# Altium PCB PCB_Receiver.PcbDoc
Units mm, origin at the board's own origin, x right, y up, seen from the top; angles counter-clockwise.
Board outline 144.4 x 91.06 mm, 2 copper layers (Top Layer, Bottom Layer); 83 components, 36 nets, 194 pads, 0 vias.
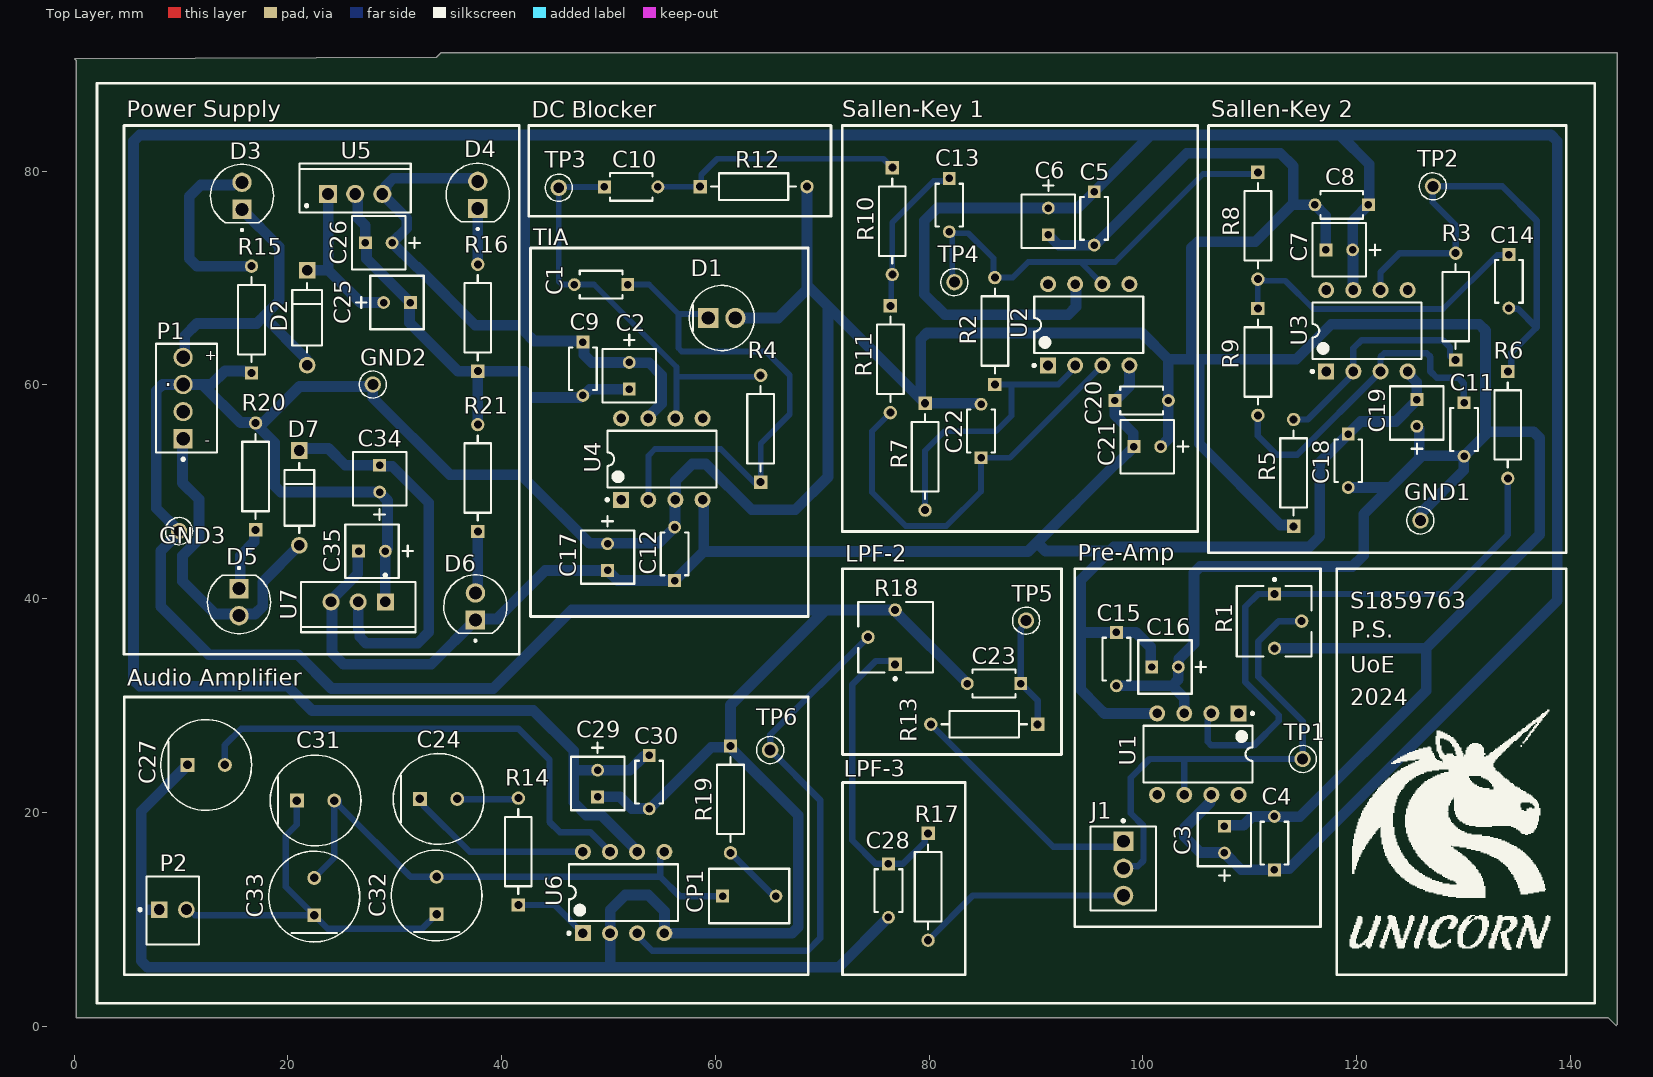
[diagram p0: Top Layer view]
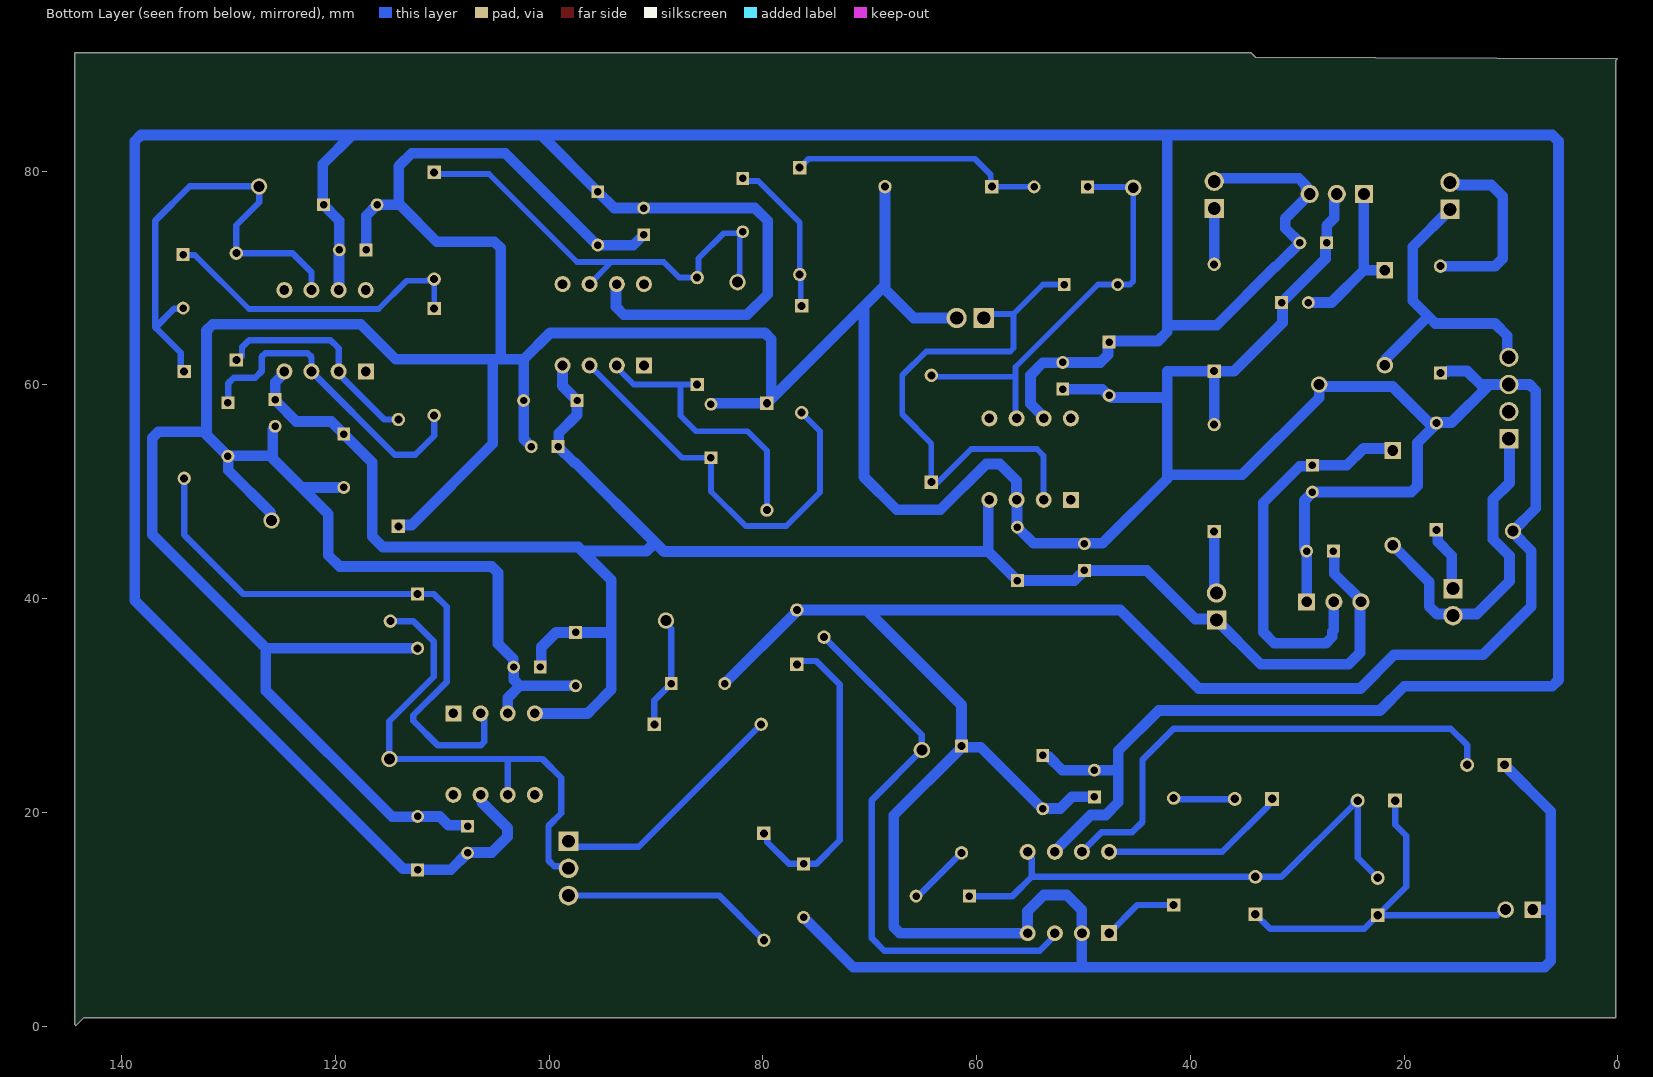
[diagram p1: Bottom Layer view, seen from below]
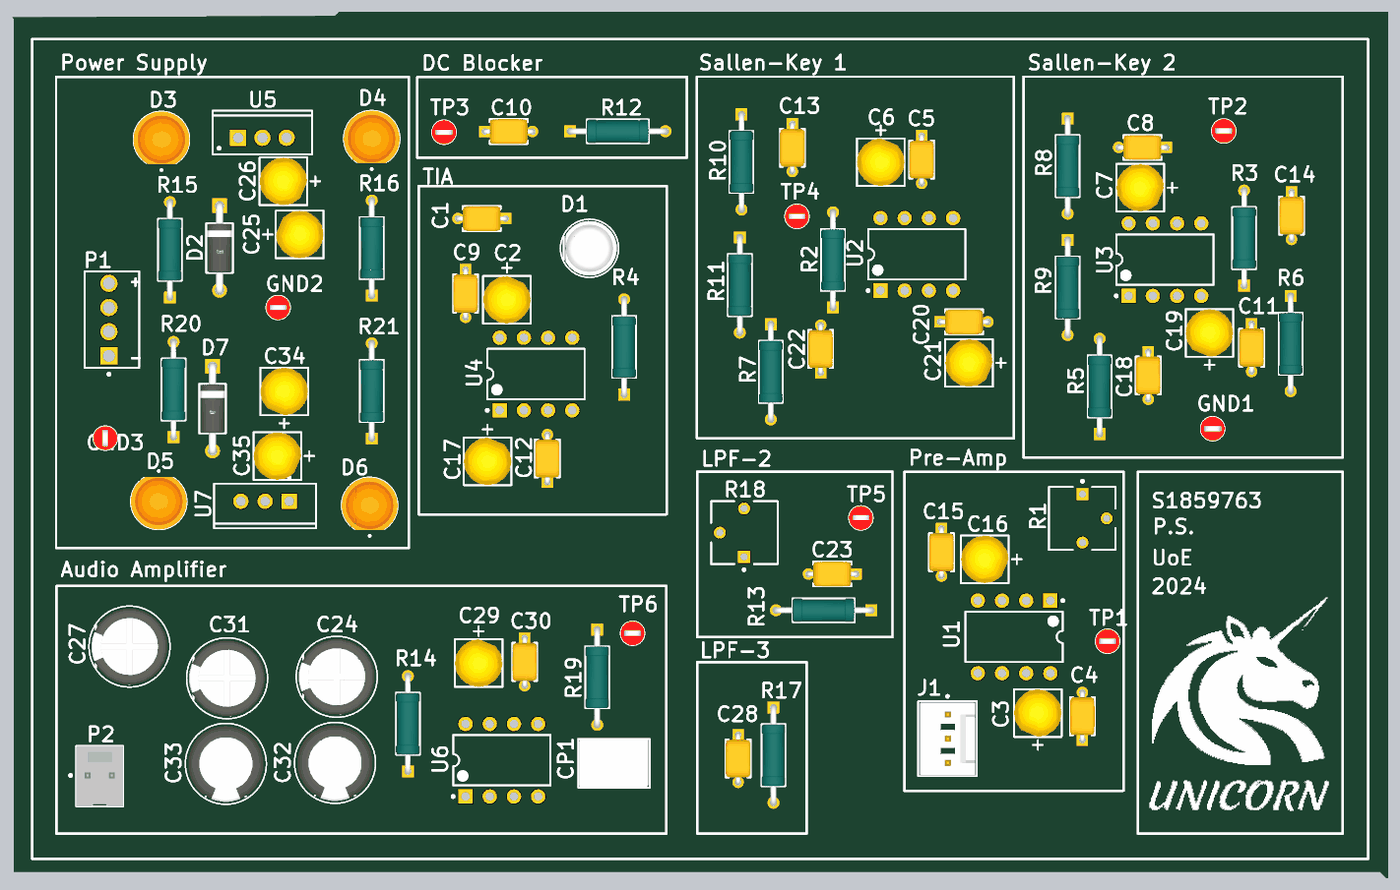
[diagram p2: 3D render of the assembled board from above, using the file's embedded part models]

## Layer stack, top to bottom
Top Solder: solder mask 0.0102, Solder Resist, Dk 3.5
Top Layer: signal copper 0.0356
Dielectric 1: dielectric 0.32, FR-4, Dk 4.8
Bottom Layer: signal copper 0.0356
Bottom Solder: solder mask 0.0102, Solder Resist, Dk 3.5

## Board outline
33.909,90.678 34.341,91.11 144.424,91.11 144.424,0.178 144.297,0.051 143.586,0.762 0.178,0.762 0.178,90.373 0.025,90.526

## Design rules (kind name [scope] priority, off if disabled: settings)
Clearance [All] p1: gap=0.6 ignorepadtopadclearanceinfootprint=FALSE
PlaneClearance [All] p1: clearance=0.6
PlaneConnect [InNet('GND')] p1: planeconnectstyle=Relief reliefexpansion=0.408 reliefentries=4 reliefconductorwidth=0.254 reliefairgap=0.254
PolygonConnect [All] p1: connectstyle=Relief reliefconductorwidth=1 reliefentries=4 polygonreliefangle="90 Angle" airgapwidth=1
RoutingVias [All] p1: holewidth=0.711 width=1.27 viastyle="Through Hole" minholewidth=0.711 minwidth=1.27 maxholewidth=0.711 maxwidth=1.27
SolderMaskExpansion [All] p1: expansion=0.102 istentingtop=FALSE
Width PS [(InNet('NetD3_A') OR InNet('NetD4_C') OR InNet('NetC34_1') OR InNet('NetD5_A') OR InNet('NetD6_A') OR InNet('NetD5_C') OR InNet('NetC25_2') OR InNet('NetD2_2'))] p1: maxlimit=1.1 minlimit=1 preferedwidth=1
Width GND [InNet('GND')] p2: maxlimit=1.1 minlimit=1 preferedwidth=1
Width -12 [InNet('-12V')] p3: maxlimit=1.1 minlimit=1 preferedwidth=1
Width +12 [InNet('+12V')] p4: maxlimit=1.1 minlimit=1 preferedwidth=1
Width ALL [InNetClass('All Nets')] p5: maxlimit=0.6 minlimit=0.54 preferedwidth=0.54
28 further rules are at their usual default settings.

## Classes and differential pairs
net class C33_Nets: NetC31_1 NetC31_2
net class C31_Nets: NetC31_1 NetC31_2
net class C29_Nets: +12V GND NetC29_2
net class C24_Nets: NetC24_1 NetC24_2
net class C4_Nets: +12V GND
net class C2_Nets: +12V GND
net class C1_Nets: NetC1_1 NetC1_2
net class C3_Nets: +12V GND
net class U6_Nets: +12V GND NetC24_1 NetC27_2 NetC31_2 NetR14_1 NetR18_2
net class C17_Nets: -12V GND
net class P2_Nets: GND NetC31_1
net class C27_Nets: GND NetC27_2
net class C16_Nets: -12V GND
net class TP2_Nets: NetC14_2
net class CP1_Nets: NetC31_2 NetCP1_2
net class C30_Nets: +12V GND
net class TP6_Nets: NetR18_2
net class GND3_Nets: GND
net class GND1_Nets: GND
net class TP3_Nets: NetC1_2
net class TP1_Nets: NetJ1_2
net class TP4_Nets: NetC13_2
net class C34_Nets: GND NetC34_1
net class J1_Nets: NetJ1_1 NetJ1_2 NetJ1_3
net class TP5_Nets: NetC23_1
net class R20_Nets: GND NetD5_C
net class D7_Nets: NetC34_1 NetD5_A
net class D6_Nets: -12V NetD6_A
net class D5_Nets: NetD5_A NetD5_C
net class D4_Nets: +12V NetD4_C
net class U7_Nets: -12V GND NetC34_1
net class U2_Nets: +12V -12V NetC13_2 NetC22_1 NetR2_1 NetU2_1 NetU2_5 NetU2_7 NetU2_8
net class R13_Nets: NetC23_1 NetJ1_1
net class R12_Nets: GND NetC10_2
net class C32_Nets: NetC31_1 NetC31_2
net class C14_Nets: NetC14_1 NetC14_2
net class U1_Nets: +12V -12V GND NetJ1_2 NetR1_1
net class C12_Nets: -12V GND
net class R19_Nets: GND NetCP1_2
net class C8_Nets: +12V GND
net class U3_Nets: +12V -12V NetC11_1 NetC14_2 NetR3_1
net class U4_Nets: +12V -12V GND NetC1_1 NetC1_2 NetU4_1 NetU4_5 NetU4_8
net class U5_Nets: +12V GND NetC25_2 NetU1_1 NetU1_5 NetU1_8
net class R21_Nets: GND NetD6_A
net class R16_Nets: GND NetD4_C
net class GND2_Nets: GND
net class R18_Nets: GND NetC28_1 NetR18_1 NetR18_2
net class R17_Nets: NetC28_1 NetJ1_3
net class R15_Nets: GND NetD3_A
net class R14_Nets: NetC24_2 NetR14_1
net class R11_Nets: NetC13_1 NetC22_1
net class R10_Nets: NetC10_2 NetC13_1
net class R9_Nets: NetC11_1 NetC14_1
net class R8_Nets: NetC13_2 NetC14_1
net class R7_Nets: GND NetR2_1
net class R6_Nets: NetC14_2 NetR1_1
net class R5_Nets: GND NetR3_1
net class R4_Nets: NetC1_1 NetC1_2
net class R3_Nets: NetC14_2 NetR3_1
net class R2_Nets: NetC13_2 NetR2_1
net class R1_Nets: GND NetJ1_2 NetR1_1
net class P1_Nets: GND NetD2_2 NetD5_A NetP1_2
net class D3_Nets: NetD2_2 NetD3_A
net class D2_Nets: NetC25_2 NetD2_2
net class C15_Nets: -12V GND
net class C35_Nets: -12V GND
net class C26_Nets: +12V GND
net class C28_Nets: GND NetC28_1
net class C11_Nets: GND NetC11_1
net class C10_Nets: NetC1_2 NetC10_2
net class C25_Nets: GND NetC25_2
net class C22_Nets: GND NetC22_1
net class C21_Nets: -12V GND
net class C20_Nets: -12V GND
net class C19_Nets: -12V GND
net class C18_Nets: -12V GND
net class C23_Nets: GND NetC23_1
net class C13_Nets: NetC13_1 NetC13_2
net class C6_Nets: +12V GND
net class D1_Nets: GND NetC1_1
net class C9_Nets: +12V GND
net class C7_Nets: +12V GND
net class C5_Nets: +12V GND

## Components (designator, comment, footprint, x,y, rotation, side; value= is the part's Value field where it differs from the comment)
C1 "8p" FP-K15H5-MFG 49.301,69.393 r180 top
C2 "2.2u" FP-TAP106K016SCS-MFG 51.941,60.86 r90 top
C3 "2.2u" FP-TAP106K016SCS-MFG 107.645,17.45 r270 top
C4 "0.1n" FP-K15H5-MFG 112.319,17.12 r90 top
C5 "0.1n" FP-K15H5-MFG 95.453,75.59 r270 top
C6 "2.2u" FP-TAP106K016SCS-MFG 91.161,75.311 r90 top
C7 "2.2u" FP-TAP106K016SCS-MFG 118.389,72.644 r0 top
C8 "0.1n" FP-K15H5-MFG 118.618,76.86 r180 top
C9 "0.1n" FP-K15H5-MFG 47.6,61.519 r270 top
C10 "22n" FP-K15H5-MFG 52.121,78.537 r0 top
C11 "100p" FP-K15H5-MFG 130.073,55.829 r270 top
C12 "0.1n" FP-K15H5-MFG 56.185,44.196 r90 top
C13 "100p" FP-K15H5-MFG 81.89,76.835 r270 top
C14 "100p" FP-K15H5-MFG 134.264,69.698 r270 top
C15 "0.1n" FP-K15H5-MFG 97.536,34.341 r270 top
C16 "2.2u" FP-TAP106K016SCS-MFG 102.083,33.604 r0 top
C17 "2.2u" FP-TAP106K016SCS-MFG 49.911,43.891 r90 top
C18 "0.1n" FP-K15H5-MFG 119.228,52.908 r270 top
C19 "2.2u" FP-TAP106K016SCS-MFG 125.654,57.379 r270 top
C20 "0.1n" FP-K15H5-MFG 99.898,58.547 r0 top
C21 "2.2u" FP-TAP106K016SCS-MFG 100.426,54.229 r0 top
C22 "100p" FP-K15H5-MFG 84.861,55.691 r90 top
C23 "22p" FP-K15H5-MFG 86.081,32.055 r180 top
C24 "10u" FP-RAD-TH-D_8_0_5-L_11_5-MFG 34.087,21.26 r0 top
C25 "0.33u" FP-TAP106K016SCS-MFG 30.201,67.716 r180 top
C26 "0.1u" FP-TAP106K016SCS-MFG 28.493,73.302 r0 top
C27 "10u" FP-RAD-TH-D_8_0_5-L_11_5-MFG 12.344,24.435 r0 top
C28 "1n" FP-K15H5-MFG 76.2,12.675 r270 top
C29 "2.2u" FP-TAP106K016SCS-MFG 48.979,22.701 r90 top
C30 "0.1n" FP-K15H5-MFG 53.805,22.828 r270 top
C31 "47uF" FP-RAD-TH-D_8_0_5-L_11_5-MFG 22.583,21.107 r0 top
C32 "100uF" FP-EEU-FR1H101B-MFG 33.909,12.217 r90 top
C33 "100uF" FP-EEU-FR1H101B-MFG 22.454,12.118 r90 top
C34 "0.33u" FP-TAP106K016SCS-MFG 28.575,51.232 r270 top
C35 "0.1u" FP-TAP106K016SCS-MFG 27.864,44.45 r0 top
CP1 "47n" FP-R82DC4100DQ60J-MFG 63.17,12.167 r0 top
D1 "BPV10" FP-6_544-5185_02-4-MFG 60.604,66.269 r0 top
D2 "1N4007" FP-1N4007-MFG 21.793,66.294 r270 top value=15pF
D3 "RED" LEDRD254W57D500H1070 15.697,77.699 r90 top
D4 "GREEN" LEDRD254W57D500H1070 37.761,77.791 r90 top
D5 "RED" LEDRD254W57D500H1070 15.418,39.675 r270 top
D6 "GREEN" LEDRD254W57D500H1070 37.541,39.268 r90 top
D7 "1N4007" FP-1N4007-MFG 21.057,49.428 r270 top value=15pF
GND1 "" KEYSTONE_5000 125.984,47.32 r0 top
GND2 "" KEYSTONE_5000 27.94,60.046 r0 top
GND3 "" KEYSTONE_5000 9.804,46.33 r90 top
J1 "22-29-2031" FP-22-29-2031-MFG 98.176,14.757 r270 top
P1 "640456-4" TECO-640456-4 10.185,58.776 r270 top
P2 "22-23-2021" MOLX-22-23-2021_V 9.22,10.897 r0 top
R1 "3362P-1-104LF-100k" BOUR-3362P 112.293,37.897 r270 top
R2 "1K" FP-MRS25-MFG 86.157,65.049 r90 top
R3 "1k" FP-MRS25-MFG 129.286,67.335 r90 top
R4 "3k3" FP-MRS25-MFG 64.237,55.905 r90 top
R5 "2.2k" FP-MRS25-MFG 114.122,51.765 r90 top
R6 "10k" FP-MRS25-MFG 134.163,56.261 r270 top
R7 "2.2k" FP-MRS25-MFG 79.629,53.289 r270 top
R8 "270" FP-MRS25-MFG 110.769,74.905 r270 top
R9 "270" FP-MRS25-MFG 110.769,62.154 r270 top
R10 "270" FP-MRS25-MFG 76.556,75.336 r270 top
R11 "270" FP-MRS25-MFG 76.378,62.408 r270 top
R12 "4k7" FP-MRS25-MFG 63.576,78.562 r0 top
R13 "1k2" FP-MRS25-MFG 85.166,28.245 r180 top
R14 "1k2" FP-MRS25-MFG 41.554,16.332 r90 top
R15 "2k2" FP-MRS25-MFG 16.586,66.116 r90 top
R16 "33K" FP-MRS25-MFG 37.761,66.291 r90 top
R17 "1k5" FP-MRS25-MFG 79.908,13.03 r270 top
R18 "3362P-1-103LF" BOUR-3362P 76.86,36.398 r90 top
R19 "10" FP-MRS25-MFG 61.417,21.209 r270 top
R20 "2k2" FP-MRS25-MFG 16.967,51.435 r90 top
R21 "33K" FP-MRS25-MFG 37.761,51.291 r90 top
TP1 "5000" KEYSTONE_5000 114.96,24.994 r0 top
TP2 "5000" KEYSTONE_5000 127.152,78.588 r0 top
TP3 "5000" KEYSTONE_5000 45.339,78.461 r0 top
TP4 "5000" KEYSTONE_5000 82.372,69.621 r0 top
TP5 "5000" KEYSTONE_5000 89.078,37.948 r0 top
TP6 "5000" KEYSTONE_5000 65.126,25.832 r0 top
U1 "LM6171" P0008A 105.156,25.451 r270 top
U2 "LM6171" P0008A 94.945,65.634 r90 top
U3 "LM6171" P0008A 120.98,65.075 r90 top
U4 "LM318N" P0008A 54.991,53.061 r90 top
U5 "LM78L12ACZ" TO220 26.289,77.876 r0 top
U6 "LM386N-1" TI-P8 51.41,12.497 r90 top
U7 "LM79L12" NDE0003A 26.568,39.7 r180 top

## Footprints (in the part's own frame and the unit in brackets; to place one, negate y for a bottom-side part, rotate by r counter-clockwise, add the part's x,y. Pads: shape width x height; smd on the part's side, far side on the other; paste and mask are expansions set on the pad)
BOUR-3362P [mm] "THD, 3-Leads, Body 6.6x6.99mm, Pitch 2.54mm"
  rect 1.25x1.25 hole 0.75: 1(-2.54,0.035)
  round 1.25 hole 0.75: 2(0,2.575) 3(2.54,0.035)
  silkscreen extent -4.02,-3.49 3.3,3.49, body extent -3.3,-3.49 3.3,3.49, height 4.95
FP-1N4007-MFG [mm]
  rect 1.55x1.55 hole 1 paste-2539.97 mask+0: 1(-4.44,0)
  round 1.55 hole 1 paste-2539.97 mask+0: 2(4.44,0)
  silkscreen extent -3.27,-1.4 3.27,1.4, body extent -5.32,-1.5 5.32,1.5, height 0.25
FP-6_544-5185_02-4-MFG [mm]
  rect 1.9x1.9 hole 1.25 paste-2539.97 mask+0: 1(-1.27,0)
  round 1.9 hole 1.25 paste-2539.97 mask+0: 2(1.27,0)
  silkscreen extent -3.05,-3.05 3.05,3.05, body extent -3.05,-3.05 3.05,3.05, height 0.25
FP-22-29-2031-MFG [mm]
  rect 1.84x1.84 hole 1.19 paste-2539.97 mask+0: 1(-2.54,0.02)
  round 1.84 hole 1.19 paste-2539.97 mask+0: 2(0,0.02) 3(2.54,0.02)
  silkscreen extent -4.57,-3.08 3.93,3.07, body extent -4.04,-3.18 4.04,3.17, height 0.25
FP-EEU-FR1H101B-MFG [mm]
  rect 1.3x1.3 hole 0.8 paste-2539.97 mask+0: 1(-1.75,0)
  round 1.3 hole 0.8 paste-2539.97 mask+0: 2(1.75,0)
  silkscreen extent -4.25,-4.25 4.25,4.25, body extent -4.35,-4.35 4.35,4.35, height 0.25
FP-K15H5-MFG [mm]
  rect 1.2x1.2 hole 0.7 paste-2539.97 mask+0: 1(-2.5,0)
  round 1.2 hole 0.7 paste-2539.97 mask+0: 2(2.5,0)
  silkscreen extent -2,-1.3 2,1.3, body extent -3.2,-1.4 3.2,1.4, height 0.25
FP-MRS25-MFG [mm]
  rect 1.25x1.25 hole 0.75 paste-2539.97 mask+0: 1(-5,0)
  round 1.25 hole 0.75 paste-2539.97 mask+0: 2(5,0)
  silkscreen extent -3.97,-1.25 3.97,1.25, body extent -5.72,-1.35 5.72,1.35, height 0.25
FP-R82DC4100DQ60J-MFG [mm]
  rect 1.2x1.2 hole 0.7 paste-2539.97 mask+0: 1(-2.5,0)
  round 1.2 hole 0.7 paste-2539.97 mask+0: 2(2.5,0)
  silkscreen extent -3.75,-2.55 3.75,2.55, body extent -3.85,-2.65 3.85,2.65, height 0.25
FP-RAD-TH-D_8_0_5-L_11_5-MFG [mm]
  rect 1.3x1.3 hole 0.8 paste-2539.97 mask+0: 1(-1.75,0)
  round 1.3 hole 0.8 paste-2539.97 mask+0: 2(1.75,0)
  silkscreen extent -4.25,-4.25 4.25,4.25, body extent -4.35,-4.35 4.35,4.35, height 0.25
FP-TAP106K016SCS-MFG [mm]
  rect 1.2x1.2 hole 0.7 paste-2539.97 mask+0: 1(-1.25,0)
  round 1.2 hole 0.7 paste-2539.97 mask+0: 2(1.25,0)
  silkscreen extent -2.5,-2.5 3.85,2.5, body extent -2.6,-2.6 2.6,2.6, height 0.25
KEYSTONE_5000 [mm]
  round 1.53 hole 1.02: TP(0,0)
  silkscreen extent -1.27,-1.27 1.27,1.27, body extent -1.27,-1.27 1.27,1.27, height 4.57
LEDRD254W57D500H1070 [mm]
  round 1.815 hole 1.21: A(1.27,0)
  rect 1.815x1.815 / inner round 1.815 / far side rect 1.815x1.815 hole 1.21: C(-1.27,0)
  silkscreen extent -3.3,-2.96 2.96,2.96, body extent -2.6,-2.95 2.95,2.95, height 9.1
MOLX-22-23-2021_V [mm] "THD, 2-Leads, Body 6.35x4.93mm, Pitch 2.54mm"
  rect 1.55x1.55 hole 1.02: 1(-1.27,0)
  round 1.55 hole 1.02: 2(1.27,0)
  silkscreen extent -3.19,-3.25 2.47,3.1, body extent -2.46,-3.25 2.46,3.1, height 10.66
NDE0003A [mm] "FM, 3-Leads, Body 10.7x4.7mm, Pitch 2.54mm"
  rect 1.6x1.6 hole 1: 1(-2.54,0)
  round 1.6 hole 1: 2(0,0) 3(2.54,0)
  silkscreen extent -5.35,-2.62 5.35,2.85, body extent -5.4,-1.9 5.4,2.9, height 19.4
P0008A [mm] "DIP, 8-Leads, Body 10.15x6.6mm, Pitch 2.54mm"
  rect 1.5x1.5 hole 0.9: 1(-3.81,3.81)
  round 1.5 hole 0.9: 2(-3.81,1.27) 3(-3.81,-1.27) 4(-3.81,-3.81) 5(3.81,-3.81) 6(3.81,-1.27) 7(3.81,1.27) 8(3.81,3.81)
  silkscreen extent -3.93,-5.1 2.65,5.24, body extent -3.95,-5.07 3.95,5.07, height 5.08
TECO-640456-4 [mm] "Through Hole, 4-Leads, Body 10.16x5.72mm, Pitch 2.54mm"
  rect 1.8x1.8 hole 1.27 paste-2539.97: 1(3.81,0)
  round 1.8 hole 1.27 paste-2539.97: 2(1.27,0) 3(-1.27,0) 4(-3.81,0)
  silkscreen extent -5.08,-2.54 5.86,3.18, body extent -5.08,-2.54 5.08,3.18, height 10.03
TI-P8 [mm] "DIP, 8-Leads, Body 10.15x6.6mm, Pitch 2.54mm"
  rect 1.5x1.5 hole 0.9: 1(-3.81,3.81)
  round 1.5 hole 0.9: 2(-3.81,1.27) 3(-3.81,-1.27) 4(-3.81,-3.81) 5(3.81,-3.81) 6(3.81,-1.27) 7(3.81,1.27) 8(3.81,3.81)
  silkscreen extent -3.93,-5.1 2.65,5.23, body extent -3.95,-5.07 3.95,5.07, height 5.08
TO220 [mm] "TO, Thru-Hole, Vertical, Heatsink Mounted; 3 In-Line Leads; Pitch 2.54 mm"
  rect 1.7x1.7 hole 1.1: 1(-2.54,0)
  round 1.7 hole 1.1: 2(0,0) 3(2.54,0)
  silkscreen extent -5.2,-1.75 5.2,2.85, body extent -5.25,-1.8 5.25,2.9, height 19.7

## Part data
C1 C4 C5 C8 C9 C10 C11 C12 C13 C14 C15 C18 C20 C22 C23 C28 C30: library part CMP-02417-000078-1, "CAP CER 0.1UF 50V X7R RADIAL", Case/Package=Dipped, Dielectric=X7R, Dielectric Material=Ceramic, Max Operating Temperature=125°C, Min Operating Temperature=-55°C, Package Quantity=1, Tolerance=10%, Voltage=50V, Construction=RADIAL, Depth=2.5mm, Diameter=500um, Height=4mm, Height - Seated (Max)=0.257inch, Lead Diameter=0.5mm, Lead Free="Lead Free", Lead Length=30mm, Lead Pitch=5mm, Lead/Base Style="Formed Leads", Length=4mm, Mount="Through Hole", Packaging="Tape and Reel", Radiation Hardening=No, RoHS Compliant=Yes, Series=K, Termination=Radial, Thickness=2.6mm, Voltage Rating=50V, Voltage Rating (DC)=50V, Weight=0.005644oz, Width=2.5mm
  C1: Capacitance=8p
  C4 C5 C8 C9 C12 C15 C18 C20 C30: Capacitance=0.1n
  C10: Capacitance=22n
  C11 C13 C14 C22: Capacitance=100p
  C23: Capacitance=22p
  C28: Capacitance=1n
C2 C3 C6 C7 C16 C17 C19 C21 C26 C29 C35: library part CMP-04424-000616-1, "CAP TANT 10UF 10% 16V RADIAL", Capacitance=0.33u, Case/Package=Dipped, Dielectric Material=Tantalum, ESR (Equivalent Series Resistance)=3.2R, Leakage Current=1.2uA, Max Operating Temperature=125°C, Min Operating Temperature=-55°C, Package Quantity=1000, Tolerance=10%, Voltage=35V, Voltage Rating=16V, Construction=RADIAL, Diameter=5mm, Dissipation Factor=8%, Features="General Purpose", Height=9mm, Height - Seated (Max)=0.354inch, Lead Diameter=0.5mm, Lead Free="Lead Free", Lead Pitch=2.5mm, Length=9mm, Life (Hours)=1000Hour, Mount="Through Hole", Number of Pins=2, Packaging=Bulk, Polarity=Polar, Radiation Hardening=No, RoHS Compliant=Yes, Series=TAP, Size=9mm, Termination=Radial, Voltage Rating (DC)=16V
C24 C27 C31: library part CMP-05427-001162-1, "Aluminum Electrolytic Capacitors (Radial Lead Type) AEC-Q200 Qualified 47uF ±20% 63V", Case/Package=Radial, ESR (Equivalent Series Resistance)=342mR, Leakage Current=3uA, Max Operating Temperature=105°C, Min Operating Temperature=-55°C, Package Quantity=1000, Ratings=AEC-Q200, Ripple Current=405mA, Tolerance=20%, Voltage Rating=63V, Contact Plating=Tin, Diameter=8mm, Dissipation Factor=0.08%, Height=11.5mm, Height - Seated (Max)=0.492inch, Impedance=342mR, Lead Diameter=0.6mm, Lead Pitch=5mm, Length=11.5mm, Life (Hours)=2000Hour, Mount="Through Hole", Packaging="Ammo Pack", Polarity=Polar, Radiation Hardening=No, RoHS Compliant=Yes, Series=FC, Termination=Radial, Voltage Rating (DC)=63V
  C24 C27: Capacitance=10u
  C31: Capacitance=47uF
C25 C34: library part CMP-04424-000616-1, "CAP TANT 10UF 10% 16V RADIAL", Case/Package=Dipped, Dielectric Material=Tantalum, ESR (Equivalent Series Resistance)=3.2R, Leakage Current=1.2uA, Max Operating Temperature=125°C, Min Operating Temperature=-55°C, Package Quantity=1000, Tolerance=10%, Voltage=35V, Voltage Rating=16V, Capacitance=0.33u, Construction=RADIAL, Diameter=5mm, Dissipation Factor=8%, Features="General Purpose", Height=9mm, Height - Seated (Max)=0.354inch, Lead Diameter=0.5mm, Lead Free="Lead Free", Lead Pitch=2.5mm, Length=9mm, Life (Hours)=1000Hour, Mount="Through Hole", Number of Pins=2, Packaging=Bulk, Polarity=Polar, Radiation Hardening=No, RoHS Compliant=Yes, Series=TAP, Size=9mm, Termination=Radial, Voltage Rating (DC)=16V
C32 C33: library part CMP-05427-000020-1, "CAP ALUM 100UF 20% 50V RADIAL", Case/Package=Radial, ESR (Equivalent Series Resistance)=61mR, Max Operating Temperature=105°C, Min Operating Temperature=-40°C, Package Quantity=1, Ripple Current=870mA, Tolerance=20%, Voltage Rating=50V, Capacitance=100uF, Contact Plating=Tin, Diameter=8mm, Features="General Purpose", Height=11.5mm, Height - Seated (Max)=0.512inch, Impedance=61mR, Lead Diameter=0.6mm, Lead Free="Lead Free", Lead Pitch=5mm, Length=11.5mm, Life (Hours)=6000Hour, Mount="Through Hole", Packaging="Tape and Reel", Radiation Hardening=No, REACH SVHC="No SVHC", RoHS Compliant=Yes, Series=FR, Termination=Radial, Voltage Rating (DC)=50V
CP1: library part CMP-03022-000017-1, "CAP FILM 1UF 5% 63VDC RADIAL", Capacitance=1uF, Case/Package=Radial, Dielectric=PET, Insulation Resistance=30R, Max Operating Temperature=105°C, Min Operating Temperature=-55°C, Package Quantity=1700, Tolerance=5%, Voltage=63V, Voltage Rating (AC)=40V, Construction=RADIAL, Contact Plating=Tin, Depth=5mm, Dielectric Material=PET, Dissipation Factor=80%, Height - Seated (Max)=0.398inch, Lead Diameter=0.5mm, Lead Pitch=5mm, Length=7.2mm, Life (Hours)=2000Hour, Mount="Through Hole", Packaging="Tape and Reel", Radiation Hardening=No, REACH SVHC="No SVHC", RoHS Compliant=Yes, Series=R82, Termination=Radial, Type="General Purpose", Voltage Rating=63V, Voltage Rating (DC)=63V, Width=5mm
D1: library part CMP-02531-000005-1, "SENSOR PHOTODIODE 940NM RADIAL", Ambient Temperature Range High=+100°C, Ambient Temperature Range Low=-40°C, Dark Current=0.001uA, Forward Current=50mA, Forward Voltage=1V, Manufacturer=Vishay, Package=6.544-5185.02-4, Power Dissipation=215mW, Reverse Breakdown Voltage=60V, Temperature="-40°C to +100°C", Automotive=No, Category=Diode, ComponentLink2Description=Datasheet, ComponentLink2URL=http://www.vishay.com/docs/81502/bpv10.pdf, Device Class L1=Sensors, Device Class L2="Optical Sensors", Device Class L3=Photodiodes, Digikey Description="SENSOR PHOTODIODE 940NM RADIAL", Height=12.1mm, Lead Free=Yes, Manufacturer Part Number=BPV10, Max Junction Temp=+100°C, Mouser Description="Photodiodes 10V 215mW 875nm", Octopart=https://octopart.com/bpv10-vishay-39728465, Response Time=2.5ns, RoHS=TRUE, Sensor Output=Photodiode, Standoff Height=2.6mm, Temperature Range High=+100°C, Temperature Range Low=-40°C, Viewing Angle=40°, Wavelength=920nm
D2 D7: library part CMP-123542-000001-1, "Rectifier diode 1000 V 1 A DO-41, ,", Capacitance=15pF, Forward Current=1A, Manufacturer=Diotec, Max Junction Temp=+175°C, Max Repetitive Reverse Voltage=1000V, Max Surge Forward Current=27A, Peak Reverse Current=5uA, Temperature="-50°C to +175°C", Temperature Range Low=-50°C, Automotive=No, Category=Diode, ComponentLink2Description=Datasheet, ComponentLink2URL=https://datasheet.octopart.com/1N4007-Diotec-datasheet-62346875.pdf, Device Class L1="Discrete Semiconductors", Device Class L2=Diodes, Device Class L3="Rectifier Diodes", Height=2.8mm, Ipc Land Pattern Name=DIOAD888W100L520D280, Lead Free=Yes, Manufacturer Part Number=1N4007, Octopart=https://octopart.com/1n4007-diotec-4040411, Package=1N4007, Reverse Voltage=1000V, RoHS=TRUE, Temperature Range High=+175°C
D3 D4 D5 D6: library part L08R5000Q1, "LED, 5MM, ORANGE; LED / Lamp Size: 5mm / T-1 3/4; LED Colour: Orange; Typ Luminous Intensity: 4.3mcd; Viewing Angle: ...", Package=None, Availability="In Stock", Check_prices=https://www.snapeda.com/parts/L08R5000Q1/LED+Technology/view-part/?ref=eda, MF="LED Technology", MP=L08R5000Q1, Price=None, SnapEDA_Link=https://www.snapeda.com/parts/L08R5000Q1/LED+Technology/view-part/?ref=snap
  D4: Lead Pitch=2.54
  D6: Lead Pitch=2.54mm
GND1 GND2 GND3: library part 5000, "Test Point Miniature THM H .300 Nylon 46 Insulated Red PhosBronze/Silver", Package="Test Point Keystone Electronics", Check_prices=https://www.snapeda.com/parts/5000/Keystone+Electronics/view-part/?ref=eda, MF="Keystone Electronics", MP=5000, SnapEDA_Link=https://www.snapeda.com/parts/5000/Keystone+Electronics/view-part/?ref=snap
J1: library part CMP-04776-000327-1, "CONN HEADER VERT 3POS 2.54MM", Color=Natural, Contact Resistance=10mR, Current Rating=4A, Housing Color=White, Max Operating Temperature=75°C, Min Operating Temperature=0°C, Voltage Rating=250V, Connector Type="Male Pin", Contact Material=Brass, Contact Mating Length=0.295inch, Contact Plating=Gold, Contact Type="Male Pin", Depth=5.8mm, Fastening Type=Friction, Gender=Male, Housing Material=Nylon, Lead Pitch=2.54mm, Length=7.62mm, Mount="Through Hole", Number of Contacts=3, Number of Positions=3, Number of Rows=1, Orientation=Straight, Packaging=Bulk, Pitch=2.54mm, Radiation Hardening=No, RoHS Compliant=Yes, Series="KK® 6410", Termination=Solder, Working Voltage=250V
P1: library part CMP-2000-05419-1, "Male Header, Pitch 2.54 mm, 1 x 4 Position, Height 10.03 mm, Tail Length 3.56 mm, RoHS, Bulk", Color=White, Current, Rating="5 /  / A", Flammability Rating=UL94V-0, Manufacturer="TE Connectivity", Temperature, Operating="-55to+105 /  / degC", Voltage, Rating="250 /  / V", Agency Approvals=CSA,UL, Angle=Straight, Brand/Series=MTA-100Series, Color, Housing=White, Connector Type=MTA-100, Contact Centerline Spacing="0.100 /  / in.", Contact Mating Area Plating=Tin, Contact Plating=Tin, Contact Shape=Square, Contact Termination Area Plating=Tin, Datasheet URL=https://datasheet.ciiva.com/16286/eng-ds-82056-mta-0608-16286228.pdf, Datasheet Version=Dec-14, Length, Overall="0.4 /  / \"", Length, Pin="0.14 /  / \"", Length, Terminal Post="0.14 /  / in.", Manufacturer URL=http://www.te.com/, Material, Contact=CopperAlloy, Material, Housing=Polyester, Mount Angle=Vertical, Mounting Hole Size="0.04 /  / \"", Mounting Type=PCMount, Number of Contacts=4, Number of Positions=4, Number of Rows=1, Pin Spacing="0.1 /  / \"", Primary Type=InterconnectSystem, Size, Post="0.025 /  / in.", Special Features=Pinstrip, Standards=RoHSCompliant,ELVCompliant,UL94V-0, Termination=Solder, Type=PCBPlug
P2: library part CMP-1704-00001-3, "Male Header, Pitch 2.54 mm, 1 x 2 Position, Height 10.67 mm, Tail Length 3.56 mm, 0 to 75 degC, RoHS, Bulk", Max Operating Temperature="75 degC", Min Operating Temperature="0 degC", Package Quantity=3000, ComponentLink1Description="Manufacturer URL", ComponentLink1URL=http://www.molex.com/, ComponentLink2Description=Datasheet, ComponentLink2URL=https://datasheet.ciiva.com/19454/232266-19454304.pdf, Height="10.67 mm", Length="5.08 mm", Mount="Through Hole", Mounting Technology="Through Hole", PackageDescription="Male Header, Pitch 2.54 mm, 1 x 2 Position, Height 10.67 mm, Tail Length 3.56 mm", Packaging=Bulk, PartNumber=22-23-2021, Pins=2, Radiation Hardening=No, REACH SVHC=Unknown, RoHSCompliant=True, Width="6.35 mm"
R1 R18: library part CMP-1747-00004-1, "Square Trimpot(R) Trimming Potentiometer, 10 KOhm, 300 V, -55 to 125 degC, 3-Pin THD, RoHS, Tube", Case Code (Imperial)=0612, Case Code (Metric)=1632, Case/Package=1206, Max Operating Temperature=125degC, Min Operating Temperature=-25degC, Package Quantity=5000, Power Rating="1 W", Resistance="50 mohm", Tolerance=1%, Voltage Rating="220 mV", ComponentLink1Description="Manufacturer URL", ComponentLink1URL=http://www.bourns.com/, ComponentLink2Description=Datasheet, ComponentLink2URL=http://www.bourns.com/docs/Product-Datasheets/3362.pdf, DatasheetVersion=May-16, Height="0.6 mm", Length="3.2 mm", Mount="Surface Mount", PackageDescription="3-Pin Through Hole Device, Body 6.6 x 6.99 mm, Pitch 2.54 mm", PackageReference=3326P, Packaging="Tape and Reel", Pins=2, REACH SVHC="No SVHC", RoHSCompliant=True, Width="1.6 mm"
R2 R3 R4 R5 R6 R7 R8 R9 R10 R11 R12 R13 R14 R15 R16 R17 R19 R20 R21: library part CMP-02408-000051-1, "RES 1K OHM 0.6W 1% AXIAL", Case/Package=Axial, Max Operating Temperature=155°C, Max Power Dissipation=600mW, Min Operating Temperature=-55°C, Package Quantity=5000, Resistance=1kR, Resistance Tolerance=1%, Resistor Type="Metal Film", Temperature Coefficient=50ppm/°C, Voltage Rating=350V, Construction=Cylindrical, Contact Plating=Tin, Diameter=2.5mm, Lead Diameter=0.6mm, Lead Free="Lead Free", Length=6.5mm, Military Standard=Not, Mount="Through Hole", Number of Pins=2, Number of Terminations=2, Packaging="Tape and Reel", Power Rating=600mW, Radiation Hardening=No, RoHS Compliant=Yes, Series=MRS25, Technology="THIN FILM", Termination=Axial, Tolerance=1%, Voltage Rating (DC)=350V, Weight=0.00776oz, Width=2.5mm
TP1 TP2 TP3 TP4 TP5 TP6: "Test Point Miniature THM H .300 Nylon 46 Insulated Red PhosBronze/Silver", Package="Test Point Keystone Electronics", Check_prices=https://www.snapeda.com/parts/5000/Keystone+Electronics/view-part/?ref=eda, MF="Keystone Electronics", MP=5000, SnapEDA_Link=https://www.snapeda.com/parts/5000/Keystone+Electronics/view-part/?ref=snap
U1 U2 U3: library part CMP-0055-00139-3, "High Speed Low Power Low Distortion Voltage Feedback Amplifier, 8-pin MDIP, Pb-Free", Manufacturer="Texas Instruments", Package Reference=P0008A, PackageTopMarking=NSUZXYTTE#*LM6171*BIN, PowerWise=Y, Code_JEDEC=MS-001-BA, ComponentLink1Description="Datasheet URL", ComponentLink1URL=http://www.ti.com/general/docs/lit/getliterature.tsp?genericPartNumber=LM6171&fileType=pdf, CompType=Amplifiers, PackageDescription="MDIP, .365 x .250 x .130in, 8 Lead, .100in Pitch", PinCount=8, RoHS=Y
U4: library part CMP-0055-00106-3, "Operational Amplifier, 8-pin MDIP", Manufacturer="Texas Instruments", Package Reference=P0008A, PackageTopMarking=NSUZXYTTE#*LM*318N, PowerWise=N, Code_JEDEC=MS-001-BA, ComponentLink1Description="Datasheet URL", ComponentLink1URL=http://www.ti.com/general/docs/lit/getliterature.tsp?genericPartNumber=LM318-N&fileType=pdf, CompType=Amplifiers, PackageDescription="MDIP, .365 x .250 x .130in, 8 Lead, .100in Pitch", PinCount=8, RoHS=N
U5: library part CMP-0244-00483-1, "Positive Voltage Regulator, 5V, 3-Pin TO-220", ComponentLink1Description="Manufacturer URL", ComponentLink1URL=http://www.st.com, ComponentLink2Description=Datasheet, ComponentLink2URL=http://www.st.com/internet/com/TECHNICAL_RESOURCES/TECHNICAL_LITERATURE/DATASHEET/CD00000444.pdf, ComponentLink3Description="Package Specification", ComponentLink3URL=http://www.st.com/internet/com/TECHNICAL_RESOURCES/TECHNICAL_LITERATURE/PACKAGE_INFORMATION/CD00004649.pdf, DatasheetVersion=16/11/2011, PackageDescription="TO, Thru-Hole, Vertical, Heatsink Mounted; 3 In-Line Leads; Pitch 2.54 mm", PackageReference=TO220, PackageVersion=ver3.0
U6: library part CMP-0057-00051-3, "Low Voltage Audio Power Amplifier, 0 to 70 degC, 8-pin DIP (P8)", Manufacturer="Texas Instruments", Code_JEDEC=MS-001, ComponentLink1Description="Manufacturer URL", ComponentLink1URL=http://www.ti.com/, ComponentLink2Description=Datasheet, ComponentLink2URL=http://www.ti.com/general/docs/lit/getliterature.tsp?genericPartNumber=LM386&fileType=pdf, ComponentLink3Description="Package Specification", ComponentLink3URL=http://www.ti.com/litv/pdf/mpdi001b, DatasheetVersion=SNAS545A, Input Type=Analog, Max. Number of Speaker Outputs=1, Mounting Technology="Through Hole", PackageDescription="8-Pin Plastic In-Line, Body 9.59 x 6.35 mm, Pitch 2.54 mm", PackageReference=P8, PackageVersion="4040082/E, 04/2010", PartNumber=LM386N-1, SubFamily="Mid/High-Power Amplifier"
U7: library part CMP-0062-02473-3, "3-Terminal Negative Regulator, 3-pin TO-220, Pb-Free", Manufacturer="Texas Instruments", PackageTopMarking=NSUZXYTTE#*LM7912CT, PowerWise=N, ComponentLink1Description="Datasheet URL", ComponentLink1URL=http://www.ti.com/general/docs/lit/getliterature.tsp?genericPartNumber=LM7912&fileType=pdf, CompType="LDO IC", PackageDescription="TO-220, Molded, 3 Lead, Straight", PackageReference=NDE0003A, PinCount=3, RoHS=Y

## Nets (pads, with @x,y where several pads share a name; then routed paths per layer and width w, separated by ;. In a path a pad name is that pad's centre, name@x,y a point inside that pad or via, vN(x,y) a via of type N, cw(c..) or ccw(c..) an arc to the next point about the centre after c; other vN are vias at no path point)
+12V: C2.2 C3.2 C4.1 C5.1 C6.2 C7.2 C8.1 C9.1 C26.2 C29.2 C30.1 D4.A U1.7 U2.7 U3.7 U4.7 U5.3 U6.6 | length 477.9
  Bottom Layer w1: U5.3 28.829,78.066 29.179,78.416 29.179,78.658 29.861,79.34 37.26,79.34 37.54,79.061 D4.A ; U5.3@28.963,77.731 31.115,75.579 31.115,74.674 C26.2 31.994,71.052 32.07,71.052 37.539,65.583 42.164,65.583 ; C9.1 C9.1@47.7,63.919 ; U6.6 52.68,16.383 49.312,19.751 47.923,19.751 46.736,20.938 46.736,23.951 ; U4.7 53.721,57.006 54.966,58.25 54.966,60.909 53.803,62.072 51.979,62.072 C2.2 48.431,62.11 47.7,62.841 C9.1@47.7,63.919 ; C30.1 53.705,25.228 53.269,25.228 51.992,23.951 C29.2 46.736,23.951 ; U2.7 93.751,69.367 93.751,67.31 93.015,66.573 81.483,66.573 79.553,68.504 79.553,75.362 80.752,76.561 C6.2 93.924,76.561 C5.1 100.751,83.388 ; U1.7 106.33,21.545 106.33,20.961 103.907,18.537 103.907,17.709 105.377,16.238 107.553,16.238 C3.2@107.591,16.2 ; C3.2 109.225,14.62 C4.1 ; C4.1@112.419,14.72 113.678,14.72 138.786,39.827 138.786,82.802 138.2,83.388 118.456,83.388 ; U3.7 119.675,68.92 119.675,72.609 C7.2 119.639,75.382 C8.1@121.194,76.937 ; C8.1 C8.1@121.194,76.937 ; 41.808,83.388 42.164,83.388 100.751,83.388 ; 41.808,83.388 42.164,83.033 42.164,65.583 ; 41.808,83.388 6.123,83.388 5.537,82.802 5.537,32.387 6.123,31.801 19.99,31.801 22.25,29.54 42.951,29.54 46.736,25.756 46.736,23.951 ; 42.164,65.583 42.164,64.984 43.029,64.119 47.5,64.119 C9.1@47.7,63.919 ; 100.751,83.388 118.456,83.388 ; 118.456,83.388 121.194,80.65 C8.1@121.194,76.937
-12V: C12.1 C15.1 C16.1 C17.1 C18.1 C19.1 C20.1 C21.1 C35.1 D6.C U1.4 U2.4 U3.4 U4.4 U7.3 | length 189.2
  Bottom Layer w1: C35.1 26.516,44.352 26.516,42.335 24.028,39.847 U7.3 24.117,39.612 24.117,34.938 25.197,33.858 33.401,33.858 37.643,38.1 39.548,38.1 44.089,42.641 C17.1 50.856,41.696 C12.1 58.903,44.414 ; U4.4 58.897,49.155 58.897,48.801 58.903,48.795 58.903,44.414 ; U2.4 98.755,59.904 C20.1 97.398,57.186 99.105,55.479 99.105,54.3 C21.1 97.662,52.715 97.557,52.715 90.099,45.257 ; C16.1 100.733,33.704 100.733,35.47 99.362,36.841 94.274,36.841 94.183,36.932 ; U1.4 96.422,29.261 95.836,29.847 94.183,31.499 94.183,36.932 ; U3.4 124.79,61.13 125.654,60.266 C19.1 ; C19.1@125.654,58.563 125.589,58.563 125.554,58.529 125.554,58.463 123.669,56.578 120.398,56.578 116.578,52.759 116.578,45.831 115.584,44.837 97.276,44.837 96.908,44.469 ; 58.903,44.414 89.256,44.414 90.099,45.257 ; 90.099,45.257 90.888,44.469 96.908,44.469 ; 94.183,36.932 94.183,41.744 96.908,44.469
GND: C2.1 C3.1 C4.2 C5.2 C6.1 C7.1 C8.2 C9.2 C11.2 C12.2 C15.2 C16.2 C17.2 C18.2 C19.2 C20.2 C21.2 C22.2 C23.2 C25.1 C26.1 C27.1 C28.2 C29.1 C30.2 C34.2 C35.2 D1.2 GND1.TP GND2.TP GND3.TP P1.3 P2.1 R1.3 R5.1 R7.1 R12.2 R15.1 R16.1 R18.3 R19.1 R20.2 R21.2 U1.3 U4.3 U5.2 U6.2 U6.4 U7.1 | length 798
  Bottom Layer w1: P2.1 6.274,10.897 ; C27.1 6.274,20.114 6.274,10.897 ; R15.1 16.461,61.241 15.95,61.241 15.875,61.316 14.097,61.316 12.827,60.046 11.989,60.046 ; U5.2 26.423,77.742 26.423,77.247 26.543,77.127 26.543,75.616 27.237,74.922 27.237,73.402 27.243,73.396 C26.1 ; C26.1@27.343,73.202 27.343,71.824 C25.1 31.373,67.639 31.373,65.833 35.915,61.291 R16.1 ; GND2.TP@27.721,59.858 21.082,59.858 17.707,56.483 R20.2@16.919,56.483 ; GND2.TP 27.94,58.801 35.154,51.587 42.164,51.587 ; C34.2@28.575,49.928 29.317,49.186 29.317,44.707 29.114,44.504 C35.2 29.111,44.447 29.111,39.703 U7.1 ; C34.2 19.331,49.982 18.745,50.568 18.745,54.589 16.967,56.367 R20.2 R20.2@16.919,56.483 ; R21.2 R16.1 ; C29.1 51.079,21.451 52.163,20.366 53.766,20.366 C30.2 53.859,20.327 59.615,26.083 60.749,26.083 ; C2.1 48.245,59.61 47.654,59.019 C9.2 47.545,59.019 47.353,58.826 42.164,58.826 ; 60.749,26.084 61.292,26.084 R19.1 61.417,30.044 70.311,38.938 ; R19.1@61.542,25.932 67.751,19.723 67.751,9.273 67.165,8.687 U6.4 55.245,8.712 55.245,10.744 53.721,12.268 51.564,12.268 50.165,10.87 50.165,8.712 U6.2 50.165,8.661 50.165,5.664 50.317,5.512 ; D1.2 65.884,66.269 68.576,68.961 68.576,69.32 ; R12.2 68.576,69.32 ; C28.2 71.537,5.512 50.317,5.512 ; R18.3@76.758,38.938 70.311,38.938 ; R18.3 76.825,38.871 76.95,38.746 76.95,38.685 83.515,32.12 C23.2 ; R7.1@79.504,58.414 79.424,58.495 79.402,58.495 70.536,67.361 ; C22.2 84.807,58.191 84.709,58.289 R7.1 79.218,58.7 79.218,64.286 79.804,64.872 99.934,64.872 102.398,62.408 ; C6.1 92.131,73.09 C5.2 ; C5.2@95.507,73.09 104.103,81.686 112.878,81.686 114.08,80.484 114.08,76.97 113.97,76.86 ; C15.2@97.57,31.841 102.747,31.841 ; C21.2 102.398,54.951 C20.2 102.398,62.408 ; C16.2@103.333,33.55 103.333,32.427 102.747,31.841 ; C16.2 103.371,33.642 103.371,34.359 104.8,35.789 104.8,42.416 105.386,43.002 119.609,43.002 120.675,44.069 120.675,47.914 123.169,50.408 ; U1.3 103.886,30.702 102.747,31.841 ; C3.1 107.745,18.8 109.425,18.8 110.245,19.62 C4.2 112.357,19.581 114.704,19.581 126.517,31.394 126.517,35.357 ; R1.3 126.517,35.357 ; R5.1 113.997,46.89 112.88,46.89 105.283,54.487 105.283,62.408 ; C7.1 117.139,75.839 C8.2 113.97,76.86 ; C18.2 123.169,50.408 ; C19.2 125.654,56.074 125.882,55.846 125.882,53.416 ; 125.931,53.367 130.035,53.367 C11.2 ; GND1.TP 126.085,47.422 126.085,48.057 130.035,52.006 130.035,53.291 C11.2 ; 126.128,53.367 123.169,50.408 ; 6.274,10.897 6.274,6.098 6.86,5.512 50.317,5.512 ; 11.989,60.046 P1.3 8.257,60.046 7.671,59.46 7.671,48.463 GND3.TP 9.804,46.186 8.077,44.459 8.077,39.268 12.598,34.747 20.93,34.747 24.079,31.598 39.218,31.598 46.558,38.938 70.311,38.938 ; 11.989,60.046 15.552,56.483 R20.2@16.919,56.483 ; R16.1 42.164,61.291 42.164,58.826 ; 42.164,51.587 42.164,51.232 48.216,45.179 49.873,45.179 C17.2 49.949,45.179 54.668,45.179 C12.2 56.223,46.734 56.223,49.213 U4.3 56.261,51.029 57.836,52.603 59.098,52.603 63.391,48.311 67.462,48.311 70.536,51.384 70.536,67.361 ; 42.164,51.587 42.164,58.826 ; 68.576,69.32 70.536,67.361 ; 102.398,62.408 104.546,62.408 ; 104.546,62.408 105.283,62.408 ; 104.546,62.408 104.546,72.82 105.132,73.406 110.515,73.406 113.97,76.86 ; 105.283,62.408 114.351,62.408 117.627,65.684 131.499,65.684 132.085,65.099 132.085,55.341 ; 126.517,35.357 137.158,45.997 137.158,55.04 136.572,55.626 132.37,55.626 132.085,55.341 ; C11.2 132.085,55.341
NetC1_1: C1.1 D1.1 R4.1 U4.2 | length 50.9
  Bottom Layer w0.54: C1.1 53.797,69.393 56.54,66.65 ; U4.2 53.734,49.264 53.734,53.379 54.356,54 60.507,54 62.881,51.626 63.76,50.747 63.919,50.905 R4.1 64.237,54.533 66.954,57.25 66.954,60.911 64.721,63.144 56.857,63.144 56.54,63.461 56.54,66.65 ; D1.1 58.953,66.65 56.54,66.65
NetC1_2: C1.2 C10.1 R4.2 TP3.TP U4.6 | length 40.4
  Bottom Layer w0.54: C1.2@46.623,69.393 48.644,69.393 56.363,61.675 56.363,60.77 ; C1.2 46.798,69.396 45.655,69.396 45.339,69.713 TP3.TP 45.415,78.537 C10.1 ; U4.6 56.363,56.972 56.363,60.77 ; R4.2 64.101,60.77 56.363,60.77
NetC10_2: C10.2 R10.1 R12.1 | length 23.9
  Bottom Layer w0.54: C10.2@54.646,78.562 R12.1 58.667,78.653 58.667,79.681 60.165,81.178 75.714,81.178 R10.1
NetC11_1: C11.1 R9.2 U3.3 | length 30.7
  Bottom Layer w0.6: R9.2 110.769,55.245 112.547,53.467 114.452,53.467 U3.3 ; U3.3@122.25,61.034 122.25,62.615 122.602,62.967 126.571,62.967 126.923,62.615 126.923,61.261 127.501,60.683 129.516,60.683 130.023,60.177 130.023,58.38 C11.1
NetC13_1: C13.1 R10.2 R11.1 | length 14.9
  Bottom Layer w0.54: R11.1 76.467,67.497 76.467,70.248 R10.2 76.556,75.208 80.429,79.081 81.636,79.081 C13.1
NetC13_2: C13.2 R2.2 R8.1 TP4.TP U2.6 | length 43.5
  Bottom Layer w0.54: TP4.TP 82.183,69.811 82.183,70.419 82.169,70.433 82.169,73.877 81.89,74.156 C13.2 82.016,74.209 83.67,74.209 86.028,71.851 86.028,70.178 R2.2 87.829,70.049 89.281,71.501 94.209,71.501 ; U2.6 94.209,71.45 94.209,71.501 ; R8.1 110.617,79.752 105.643,79.752 97.392,71.501 94.209,71.501
NetC14_1: C14.1 R8.2 R9.1 | length 29.5
  Bottom Layer w0.54: R9.1@110.769,67.154 R8.2 110.905,69.769 111.407,69.769 111.424,69.752 113.331,69.752 115.976,67.107 128.111,67.107 133.171,72.167 134.233,72.167 C14.1
NetC14_2: C14.2 R3.2 R6.1 TP2.TP U3.6 | length 46.2
  Bottom Layer w0.6: U3.6 122.25,70.561 124.024,72.335 R3.2 129.286,74.955 127.152,77.089 TP2.TP 133.655,78.588 136.855,75.387 136.855,65.385 ; R6.1 134.488,61.586 134.488,63.018 136.596,65.126 136.855,65.385 ; C14.2 134.336,67.126 135.114,67.126 136.855,65.385
NetC22_1: C22.1 R11.2 U2.3 | length 39.1
  Bottom Layer w0.54: R11.2 74.646,55.676 74.646,49.966 77.818,46.794 81.618,46.794 84.861,50.038 C22.1 87.583,53.191 U2.3
NetC23_1: C23.1 R13.1 TP5.TP | length 10.6
  Bottom Layer w0.6: TP5.TP 89.078,37.696 88.581,37.199 C23.1 90.166,30.469 R13.1
NetC24_1: C24.1 U6.8 | length 17.5
  Bottom Layer w0.6: C24.1 32.687,20.91 32.687,20.628 37.008,16.307 U6.8
NetC24_2: C24.2 R14.2 | length 5.8
  Bottom Layer w0.6: C24.2 35.851,21.245 41.467,21.245 R14.2
NetC25_2: C25.2 D2.1 U5.1 | length 15.4
  Bottom Layer w1: D2.1 23.674,70.734 ; U5.1@23.774,77.852 23.774,70.734 26.791,67.716 C25.2@28.896,67.716
NetC27_2: C27.2 U6.7 | length 46.7
  Bottom Layer w0.6: C27.2 14.094,26.297 15.613,27.816 41.571,27.816 44.475,24.911 44.475,19.101 45.42,18.156 48.29,18.156 U6.7
NetC28_1: C28.1 R17.1 R18.1 | length 29.1
  Bottom Layer w0.6: R18.1 76.516,34.168 75,34.168 72.799,31.967 72.799,17.378 75.002,15.175 77.548,15.175 79.583,17.21 79.583,17.705 R17.1
NetC31_1: C31.1 C32.1 C33.1 P2.2 | length 37
  Bottom Layer w0.6: P2.2 10.747,10.897 11.275,10.368 C33.1 ; C31.1 20.833,18.852 19.787,17.805 19.787,13.035 C33.1 ; C32.1 32.537,9.096 23.726,9.096 C33.1
NetC31_2: C31.2 C32.2 C33.2 CP1.1 U6.5 | length 51.8
  Bottom Layer w0.6: C33.2 24.333,15.748 C31.2 ; C32.2 34.098,13.967 31.473,13.967 C31.2@24.762,20.678 ; C32.2@33.914,13.962 54.846,13.962 ; U6.5 55.22,16.063 54.846,15.69 54.846,13.962 ; CP1.1 56.642,12.167 54.846,13.962 ; C31.2 C31.2@24.762,20.678 ; C31.2 24.762,21.107 C31.2@24.762,20.678
NetC34_1: C34.1 D7.1 U7.2 | length 36.9
  Bottom Layer w1: D7.1 21.243,54.055 23.796,54.055 25.369,52.482 C34.1 28.675,52.382 29.761,52.382 33.172,48.97 33.172,36.881 32.131,35.839 27.301,35.839 26.716,36.425 26.716,36.9 26.568,37.047 U7.2
NetCP1_2: CP1.2 R19.2 | length 5.9
  Bottom Layer w0.6: R19.2 65.345,12.281 65.555,12.281 CP1.2
NetD2_2: D2.2 D3.C P1.4 | length 28.1
  Bottom Layer w1: P1.4 10.338,62.739 10.338,64.618 11.481,65.761 17.069,65.761 17.45,66.142 ; D3.C 19.177,72.949 19.177,67.869 17.729,66.421 21.688,62.462 21.688,61.959 D2.2
NetD3_A: D3.A R15.2 | length 17.4
  Bottom Layer w1: D3.A 15.541,78.813 14.965,78.813 14.867,78.715 11.836,78.715 10.77,77.648 10.77,71.831 11.485,71.116 R15.2
NetD4_C: D4.C R16.2 | length 5.2
  Bottom Layer w1: R16.2 D4.C
NetD5_A: D5.A D7.2 P1.1 | length 30.9
  Bottom Layer w1: P1.1 10.185,54.616 10.135,54.566 10.135,50.829 11.669,49.294 11.669,45.557 10.135,44.022 10.135,41.631 13.204,38.561 15.262,38.561 D5.A 15.574,38.561 16.92,38.561 17.629,39.27 17.629,41.561 D7.2@21.02,44.951
NetD5_C: D5.C R20.1 | length 6.1
  Bottom Layer w1: D5.C 15.519,41.046 15.519,44.018 16.842,45.341 16.842,46.31 R20.1
NetD6_A: D6.A R21.1 | length 5.8
  Bottom Layer w1: D6.A 37.541,40.759 37.761,40.978 R21.1
NetJ1_1: J1.1 R13.2 | length 23
  Bottom Layer w0.6: R13.2 91.622,16.789 97.688,16.789 J1.1
NetJ1_2: J1.2 R1.2 TP1.TP U1.6 | length 47.9
  Bottom Layer w0.6: J1.2 98.408,14.969 99.54,14.969 100.067,15.497 100.067,18.725 98.882,19.91 98.882,23.241 100.635,24.994 103.886,24.994 ; U1.6 103.886,24.994 ; R1.2 112.712,37.897 110.803,35.988 110.803,32.695 114.96,28.538 TP1.TP@114.96,25.234 ; TP1.TP 103.886,24.994
NetJ1_3: J1.3 R17.2 | length 20
  Bottom Layer w0.6: R17.2 84.096,12.217 J1.3
NetR1_1: R1.1 R6.2 U1.2 | length 55.2
  Bottom Layer w0.6: U1.2 106.426,29.017 106.07,28.662 106.07,26.615 106.422,26.264 110.414,26.264 112.727,28.577 112.727,29.074 109.603,32.198 109.603,39.237 110.803,40.437 R1.1 128.637,40.437 134.163,45.963 R6.2
NetR2_1: R2.1 R7.2 U2.2 | length 26.3
  Bottom Layer w0.54: R7.2 79.629,53.852 81.454,55.677 86.258,55.677 87.706,57.125 87.706,60.049 ; R2.1 87.706,60.049 ; U2.2 93.675,61.633 92.091,60.049 87.706,60.049
NetR3_1: R3.1 R5.2 U3.2 | length 20.9
  Bottom Layer w0.6: R5.2 115.443,56.765 119.71,61.032 119.71,63.424 120.472,64.186 128.092,64.186 128.758,63.52 128.758,62.66 128.961,62.66 R3.1
NetR14_1: R14.1 U6.1 | length 7.1
  Bottom Layer w0.6: R14.1 44.954,11.332 U6.1
NetR18_2: R18.2 TP6.TP U6.3 | length 52.4
  Bottom Layer w0.6: U6.3 52.68,8.458 54.102,7.036 68.631,7.036 69.799,8.204 69.799,21.158 TP6.TP ; TP6.TP@65.143,25.814 65.143,27.256 R18.2
pads on no net: P1.2 U1.1 U1.5 U1.8 U2.1 U2.5 U2.8 U3.1 U3.5 U3.8 U4.1 U4.5 U4.8

## Silkscreen, mask and mechanical layers (free items; w line width, h text height)
Top Overlay:
  drawing of 55 lines, arcs and shapes, not listed
  text "Power Supply" at 4.897,85.052 h1.52
  text "Sallen-Key 1" at 71.897,85.052 h1.52
  text "Sallen-Key 2" at 106.397,85.052 h1.52
  text "DC Blocker" at 42.824,85.014 h1.52
  text "TIA" at 42.948,73.075 h1.52
  text "+" at 12.192,62.317 h1
  text "." at 8.484,59.868 h1.52
  text "-" at 12.217,54.339 h1
  text "Pre-Amp" at 93.897,43.552 h1.52
  text "LPF-2" at 72.161,43.434 h1.52
  text "S1859763" at 119.397,39.045 h1.52
  text "P.S." at 119.507,36.322 h1.52
  text "UoE" at 119.397,33.045 h1.52
  text "Audio Amplifier" at 4.953,31.826 h1.52
  text "2024" at 119.397,30.045 h1.52
  text "LPF-3" at 72.009,23.317 h1.52